# Altium PCB PCB_NACE V2_2021-09-25.pcbdoc
Units mm, origin at the board's own origin, x right, y up, seen from the top; angles counter-clockwise.
Board outline 140.46 x 137.67 mm, 2 copper layers (Top Layer, Bottom Layer); 113 components, 68 nets, 361 pads, 187 vias.
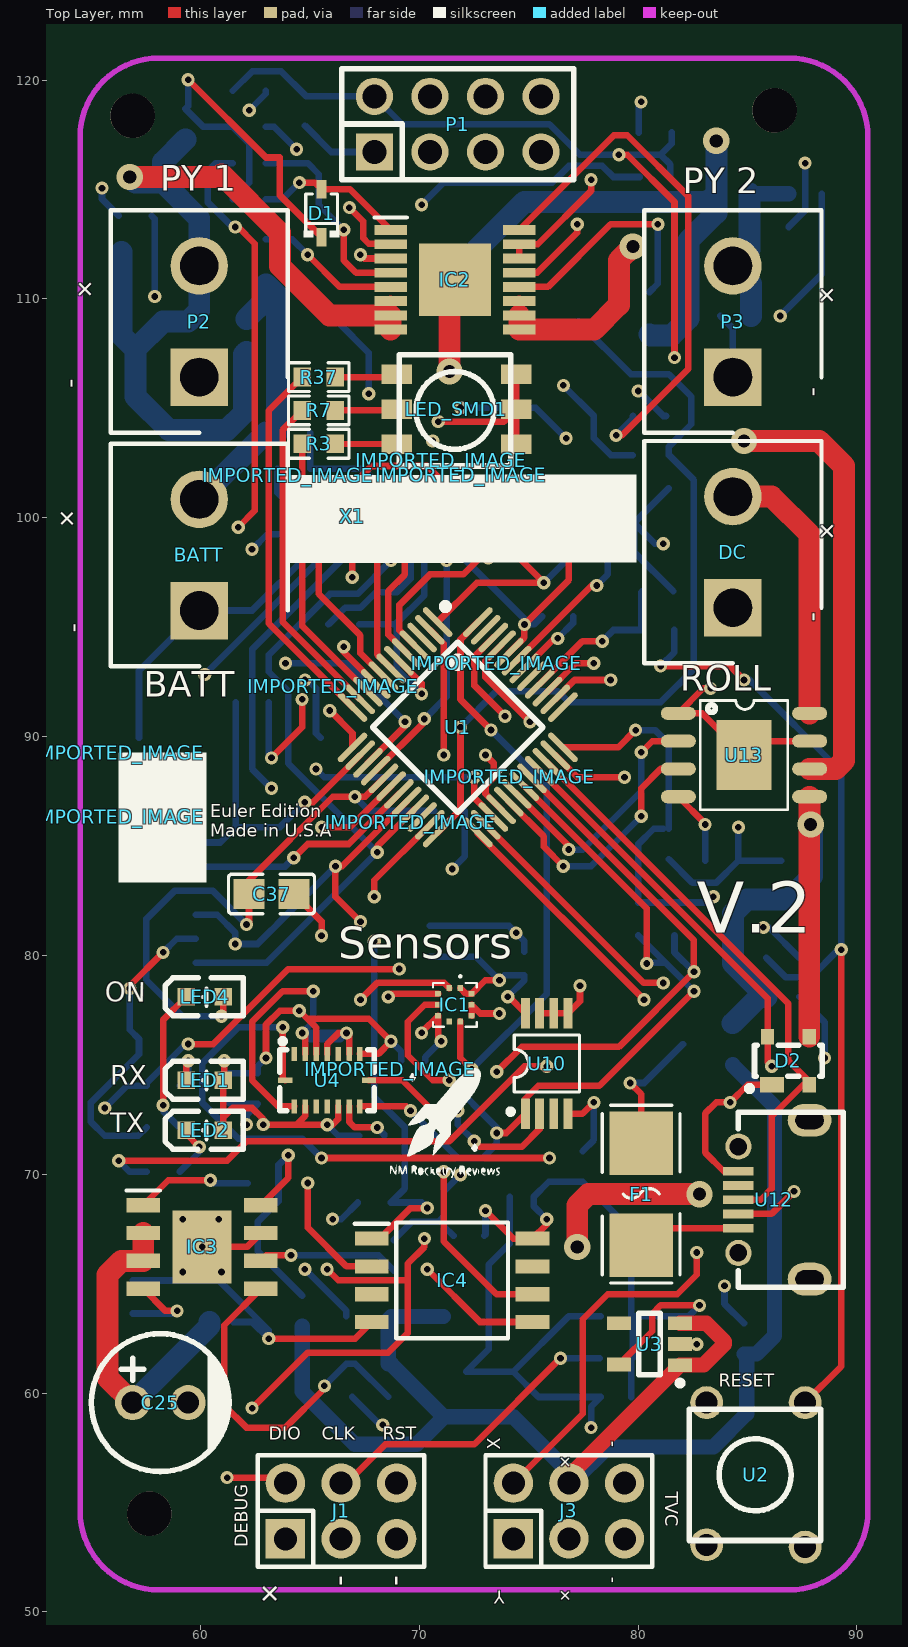
[diagram p0: Top Layer view]
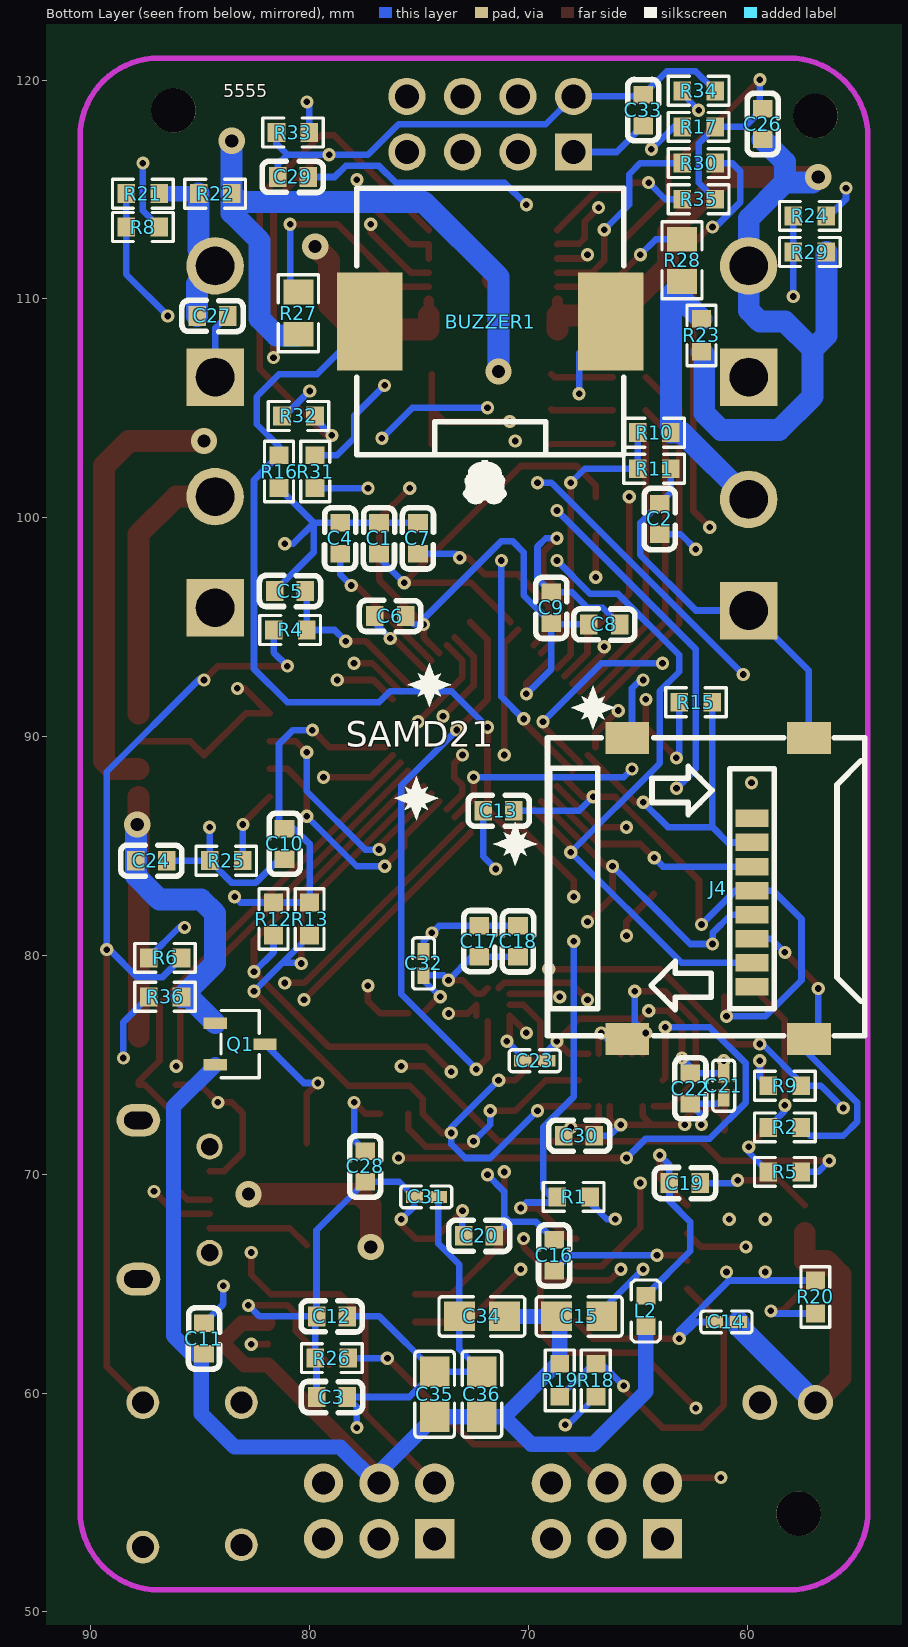
[diagram p1: Bottom Layer view, seen from below]

## Layer stack, top to bottom
Top Layer: signal copper (thickness not stored)
Dielectric: dielectric 0.32, FR-4, Dk 4.8
Bottom Layer: signal copper (thickness not stored)

## Board outline
165.862,25.4 25.4,25.4 25.4,163.068 165.862,163.068

## Components (designator, comment, footprint, x,y, rotation, side; value= is the part's Value field where it differs from the comment)
BATT "1985865" SHDR2W110P0X508_1X2_1016X810X1 59.944,95.758 r90 top
BUZZER1 "PKLCS1212E4001-R1" BUZ-SMD_2P-L12.0-W12.0-L 71.755,108.966 r0 bottom
C1 "22pF" C0603 76.835,99.06 r270 bottom
C2 "22pF" C0603 64.008,99.949 r270 bottom
C3 "100nF" C0603 78.994,59.817 r180 bottom
C4 "1uF" C0603 78.613,99.06 r270 bottom
C5 "100nF" C0603 80.899,96.647 r0 bottom
C6 "100nF" C0603 76.327,95.504 r0 bottom
C7 "100nF" C0603 75.057,99.06 r270 bottom
C8 "1uF" C0603 66.548,95.123 r180 bottom
C9 "100nF" C0603 68.961,95.885 r270 bottom
C10 "100nF" C0603 81.153,85.09 r90 bottom
C11 "1uF" C0603 84.836,62.484 r90 bottom
C12 "1uF" C0603 78.994,63.5 r0 bottom
C13 "100nF" C0603 71.374,86.614 r180 bottom
C14 "10uF" C0402 60.96,63.246 r0 bottom
C15 "22uF" C0805#1 67.691,63.5 r180 bottom
C16 "10nF" C0603 68.834,66.294 r270 bottom
C17 "100nF" C0603 72.263,80.645 r90 bottom
C18 "100nF" C0603 70.485,80.645 r270 bottom
C19 "100nF" C0603 62.865,69.596 r180 bottom
C20 "100nF" C0603 72.263,67.183 r180 bottom
C21 "10uF" C0402 61.087,74.041 r270 bottom
C22 "100nF" C0603 62.611,73.914 r90 bottom
C23 "10uF" C0402 69.723,75.184 r0 bottom
C24 "100nF" C0603 87.249,84.328 r180 bottom
C25 "22uF" CAP-TH_BD6.3-P2.50-D1.0-FD 58.166,59.563 r0 top
C26 "220nF" C0603 59.309,117.983 r90 bottom
C27 "220nF" C0603 84.455,109.22 r180 bottom
C28 "100nF" C0603 77.47,70.358 r270 bottom
C29 "100nF" C0603 80.772,115.57 r0 bottom
C30 "100nF" C0603 67.691,71.755 r180 bottom
C31 "10uF" C0402 74.676,68.961 r0 bottom
C32 "10uF" C0402 74.803,79.629 r90 bottom
C33 "100nF" C0603 64.77,118.618 r90 bottom
C34 "22uF" C0805#1 72.136,63.5 r0 bottom
C35 "22uF" C0805#1 74.295,59.944 r90 bottom
C36 "22uF" C0805#1 72.136,59.944 r90 bottom
C37 "22uF" C0805#2 63.246,82.804 r180 top
D1 "BAS21" SOD-323_L1.8-W1.3-LS2.5-RD 65.532,113.919 r90 top
D2 "SP0503BAHTG" SOT-143_L2.9-W1.3-P1.92-LS2.3-BR 86.868,75.184 r270 top
DC "DC Motor" SHDR2W110P0X508_1X2_1016X810X1 84.328,95.885 r90 top
F1 "0451.500MRL" FUSE-SMD_L6.1-W2.7 80.137,69.088 r90 top
IC1 "BMP388" BMP388 71.374,77.978 r0 top
IC2 "TPS2HB35AQPWPRQ1" SOP65P640X120-17N 71.628,110.871 r0 top
IC3 "AP64352SP-13" SOIC127P600X163-9N 60.071,66.675 r0 top
IC4 "S25FL128LAGMFI010" SOIC127P800X216-8N 71.501,65.151 r0 top
IMPORTED_IMAGE "IMPORTED_IMAGE" IMPORTED_IMAGE 56.261,89.257 r0 top
IMPORTED_IMAGE "IMPORTED_IMAGE" IMPORTED_IMAGE 56.261,86.336 r0 top
IMPORTED_IMAGE "IMPORTED_IMAGE" IMPORTED_IMAGE 71.922,101.961 r0 top
IMPORTED_IMAGE "IMPORTED_IMAGE" IMPORTED_IMAGE 66.061,92.306 r0 top
IMPORTED_IMAGE "IMPORTED_IMAGE" IMPORTED_IMAGE 73.542,93.356 r0 top
IMPORTED_IMAGE "IMPORTED_IMAGE" IMPORTED_IMAGE 74.136,88.172 r0 top
IMPORTED_IMAGE "IMPORTED_IMAGE" IMPORTED_IMAGE 69.617,86.083 r0 top
IMPORTED_IMAGE "IMPORTED_IMAGE" IMPORTED_IMAGE 64.008,101.949 r0 top
IMPORTED_IMAGE "IMPORTED_IMAGE" IMPORTED_IMAGE 68.667,74.803 r0 top
IMPORTED_IMAGE "IMPORTED_IMAGE" IMPORTED_IMAGE 71.006,102.623 r0 top
J1 "Header-Male-2.54_2x3" HDR-TH_6P-P2.54-V-R2-C3-S2.54 66.421,54.61 r0 top
J3 "2x3" HDR-TH_6P-P2.54-V-R2-C3-S2.54 76.835,54.61 r0 top
J4 "47219-2001" TF-SMD_472192001 61.341,83.058 r270 bottom
L2 "5.6uH" L0603 64.643,63.754 r270 bottom
LED1 "RXLED" LED0603-R-RD 60.198,74.295 r0 top
LED2 "TXLED" LED0603-R-RD 60.198,72.009 r0 top
LED4 "POWERLED" LED0603-R-RD 60.198,78.105 r0 top
LED_SMD1 "SMD LED" "SMD 5050 RGB" 69.088,107.442 r0 top
P1 "NRF24L01" HDR-TH_8P-P2.54-V-M-R2-C4-S2.54 71.755,117.983 r0 top
P2 "1985865" SHDR2W110P0X508_1X2_1016X810X1 59.944,106.426 r90 top
P3 "1985865" SHDR2W110P0X508_1X2_1016X810X1 84.328,106.426 r90 top
Q1 "DMP3098L" SOT-23-3_L2.9-W1.6-P1.90-LS2.8-BR 83.185,75.946 r180 bottom
R1 "1K" R0603#1 67.945,68.961 r0 bottom
R2 "1K" R0603#1 58.293,72.136 r0 bottom
R3 "100Ω" R0603#2 65.405,103.378 r0 top
R4 "330" R0603#1 80.899,94.869 r180 bottom
R5 "1K" R0603#1 58.293,70.104 r0 bottom
R6 "10kΩ" R0603#1 86.614,79.883 r0 bottom
R7 "100Ω" R0603#2 65.405,104.902 r0 top
R8 "150K" R0603#1 87.63,113.284 r0 bottom
R9 "1K" R0603#1 58.293,74.041 r0 bottom
R10 "10kΩ" R0603#1 64.262,103.886 r0 bottom
R11 "4.7K" R0603#1 64.262,102.235 r0 bottom
R12 "4.7K" R0603#1 81.661,81.661 r90 bottom
R13 "4.7K" R0603#1 80.01,81.661 r270 bottom
R15 "1K" R0603#1 62.357,91.567 r0 bottom
R16 "1K" R0603#1 81.407,102.108 r270 bottom
R17 "1K" R0603#1 62.23,117.856 r0 bottom
R18 "22.1K" R0603#1 66.929,60.579 r270 bottom
R19 "115K" R0603#1 68.58,60.579 r270 bottom
R20 "200K" R0603#1 56.896,64.389 r90 bottom
R21 "240K" R0603#1 87.63,114.808 r180 bottom
R22 "100K" R0603#1 84.328,114.808 r0 bottom
R23 "100K" R0603#1 62.103,108.331 r270 bottom
R24 "150K" R0603#1 57.15,113.792 r0 bottom
R25 "18K" R0603#1 83.82,84.328 r0 bottom
R26 "1K" R0603#1 78.994,61.595 r0 bottom
R27 "25K" R0805 80.518,109.347 r90 bottom
R28 "25K" R0805 62.992,111.76 r270 bottom
R29 "240K" R0603#1 57.15,112.141 r180 bottom
R30 "15K" R0603#1 62.23,116.205 r180 bottom
R31 "15K" R0603#1 79.756,102.108 r90 bottom
R32 "15K" R0603#1 80.518,104.648 r180 bottom
R33 "15K" R0603#1 80.772,117.602 r180 bottom
R34 "15K" R0603#1 62.23,119.507 r0 bottom
R35 "4.7K" R0603#1 62.23,114.554 r0 bottom
R36 "10kΩ" R0603#1 86.614,78.105 r0 bottom
R37 "100Ω" R0603#2 65.405,106.426 r0 top
U1 "ATSAMD21G18A-AU" TQFP-48_L7.0-W7.0-P0.50-LS9.0-BL 71.755,90.424 r225 top
U2 "RESET" "PUSH BUTTON 6MM TA" 85.344,56.261 r270 top
U3 "AP2112K-3.3TRG1" SOT-25-5_L3.0-W1.8-P0.95-LS3.0-BR 80.518,62.23 r0 top
U4 "BMI088" LGA-16_L4.5-W3.0-P0.50-BL 65.786,74.295 r270 top
U10 "MCP9808T-E/MS" MSOP-8_L3.0-W3.0-P0.65-LS4.9-BL 75.819,75.057 r0 top
U12 "MicroUSB" MICROUSB 84.582,68.834 r270 top
U13 "DRV8871DDAR" SO-8_L4.9-W3.9-P1.27-LS6.0-BL-EP 84.836,89.154 r270 top
X1 "32.768KHz" FC-12M_L2.0-W1.2 66.929,100.076 r90 top

## Footprints (in the part's own frame and the unit in brackets; to place one, negate y for a bottom-side part, rotate by r counter-clockwise, add the part's x,y. Pads: shape width x height; smd on the part's side, far side on the other; paste and mask are expansions set on the pad)
BMP388 [mm]
  rect 0.25x0.275 smd: 1(0.5,0.526) 2(0,0.526) 6(0,-1) 7(0.5,-1)
  rect 0.275x0.25 smd: 3(-0.512,0.263) 4(-0.512,-0.237) 5(-0.512,-0.737) 8(1.012,-0.737) 9(1.012,-0.237) 10(1.012,0.263)
  silkscreen extent -0.75,-1.24 1.25,1.11
BUZ-SMD_2P-L12.0-W12.0-L [mm]
  rect 3x4.5 smd: 1(5.5,0) 2(-5.5,0)
  silkscreen extent -6.1,-6.1 6.1,6.1
C0402 [mm]
  rect 0.79x0.54 smd: 1(0.545,0) 2(-0.545,0)
  silkscreen extent -1.17,-0.5 1.17,0.5
C0603 [mm]
  rect 0.8x0.9 smd: 1(0.7,0) 2(-0.7,0)
  silkscreen extent -1.39,-0.72 1.41,0.71
C0805#1 [mm]
  rect 1.41x1.35 smd: 1(1.03,0) 2(-1.03,0)
  silkscreen extent -1.96,-0.9 1.96,0.9
C0805#2 [mm]
  rect 1.41x1.35 smd: 1(-1.03,0) 2(1.03,0)
  silkscreen extent -1.96,-0.9 1.96,0.9
CAP-TH_BD6.3-P2.50-D1.0-FD [mm]
  round 1.6 hole 1: 1(-1.27,0) 2(1.27,0)
  silkscreen extent -3.15,-3.15 3.17,3.15
FC-12M_L2.0-W1.2 [mm]
  rect 0.925x1.3 smd: 1(-0.863,0) 2(0.863,0)
  silkscreen extent -1.55,-0.88 1.55,0.88
FUSE-SMD_L6.1-W2.7 [mm]
  rect 2.91x2.905 smd: 1(-2.33,0) 2(2.33,0)
  silkscreen extent -4.06,-1.78 4.06,1.78
HDR-TH_6P-P2.54-V-R2-C3-S2.54 [mm]
  rect 1.8x1.8 hole 1.05: 1(-2.54,-1.27)
  round 1.8 hole 1.05: 2(-2.54,1.27) 3(0,-1.27) 4(0,1.27) 5(2.54,-1.27) 6(2.54,1.27)
  silkscreen extent -3.81,-2.54 3.81,2.54
HDR-TH_8P-P2.54-V-M-R2-C4-S2.54 [mm]
  rect 1.7x1.7 hole 1.1: 1(-3.81,-1.27)
  round 1.7 hole 1.1: 2(-3.81,1.27) 3(-1.27,-1.27) 4(-1.27,1.27) 5(1.27,-1.27) 6(1.27,1.27) 7(3.81,-1.27) 8(3.81,1.27)
  silkscreen extent -5.31,-2.54 5.31,2.54
IMPORTED_IMAGE [mm]
  silkscreen extent 0,-3 4,0
L0603 [mm]
  rect 0.8x0.864 smd: 1(-0.7,0) 2(0.7,0)
  silkscreen extent -1.41,-0.67 1.42,0.65
LED0603-R-RD [mm]
  rect 0.8x0.8 smd: 1(0.851,0) 2(-0.851,0)
  silkscreen extent -1.82,-0.86 1.77,0.86
LGA-16_L4.5-W3.0-P0.50-BL [mm]
  rect 0.65x0.25 smd: 1(-1.2,-1.498) 2(-1.2,-0.998) 3(-1.2,-0.498) 4(-1.2,0.002) 5(-1.2,0.502) 6(-1.2,1.002) 7(-1.2,1.502) 9(1.2,1.502) 10(1.2,1.002) 11(1.2,0.502) 12(1.2,0.002) 13(1.2,-0.498) 14(1.2,-0.998) 15(1.2,-1.498)
  rect 0.25x0.65 smd: 8(0,1.915) 16(0,-1.915)
  silkscreen extent -1.89,-2.16 1.4,2.16
MICROUSB [mm]
  rect 0.4x1.4 smd: 1(1.3,0) 2(0.65,0) 3(0,0) 4(-0.65,0) 5(-1.301,-0.001)
  round 1.2 hole 0.8: 6(-2.431,0) 7(2.431,0)
  oval 1.5x2 hole 0.8 slot 1.3 at 90 deg: 8(-3.63,3.251) 9(3.63,3.251)
  silkscreen extent -4,0 4,4.8
MSOP-8_L3.0-W3.0-P0.65-LS4.9-BL [mil]
  rect 15.98x55 smd: 1(-38.39,-90.55) 2(-12.8,-90.55) 3(12.8,-90.55) 4(38.39,-90.55) 5(38.39,90.55) 6(12.8,90.56) 7(-12.8,90.55) 8(-38.39,90.55)
  silkscreen extent -70,-91 59,51
"PUSH BUTTON 6MM TA" [mm]
  round 1.5 hole 1: 1(-3.302,2.286) 2(-3.302,-2.215) 3(3.302,2.286) 4(3.198,-2.215)
  silkscreen extent -3,-3 3,3
R0603#1 [mm]
  rect 0.806x0.864 smd: 1(0.753,0) 2(-0.753,0)
  silkscreen extent -1.39,-0.66 1.39,0.66
R0603#2 [mm]
  rect 0.806x0.864 smd: 1(-0.753,0) 2(0.753,0)
  silkscreen extent -1.39,-0.66 1.39,0.66
R0805 [mm]
  rect 1.133x1.377 smd: 1(0.966,0) 2(-0.966,0)
  silkscreen extent -1.76,-0.92 1.76,0.92
SHDR2W110P0X508_1X2_1016X810X1 [mm]
  rect 2.625x2.625 hole 1.75 slot 1.755 at 0 deg: 1(0,0)
  round 2.625 hole 1.75 slot 1.755 at 0 deg: 2(5.08,0)
  silkscreen extent -2.54,-4.05 7.62,4.05
"SMD 5050 RGB" [mm]
  rect 1.4x0.9 smd: 1(-0.127,-0.889) 2(5.334,-0.889) 3(-0.127,-2.489) 4(5.334,-2.489) 5(-0.127,-4.089) 6(5.334,-4.089)
  silkscreen extent 0,-5.08 5.08,0
SO-8_L4.9-W3.9-P1.27-LS6.0-BL-EP [mm]
  oval 0.6x1.6 smd: 1(-1.905,-3) 2(-0.635,-3) 3(0.635,-3) 4(1.905,-3) 5(1.905,3) 6(0.635,3) 7(-0.635,3) 8(-1.905,3)
  rect 3.2x2.5 smd: 9(0,0)
  silkscreen extent -2.5,-2 2.5,2
SOD-323_L1.8-W1.3-LS2.5-RD [mm]
  rect 0.845x0.455 smd: 1(-1.098,0) 2(1.098,0)
  silkscreen extent -1.1,-0.8 0.88,0.8
SOIC127P600X163-9N [mm]
  rect 1.525x0.65 smd: 1(-2.688,1.905) 2(-2.688,0.635) 3(-2.688,-0.635) 4(-2.688,-1.905) 5(2.688,-1.905) 6(2.688,-0.635) 7(2.688,0.635) 8(2.688,1.905)
  rect 2.71x3.35 smd: 9(0,0)
  silkscreen extent -3.45,2.58 -1.93,2.58
SOIC127P800X216-8N [mm]
  rect 1.55x0.65 smd: 1(-3.675,1.905) 2(-3.675,0.635) 3(-3.675,-0.635) 4(-3.675,-1.905) 5(3.675,-1.905) 6(3.675,-0.635) 7(3.675,0.635) 8(3.675,1.905)
  silkscreen extent -4.45,-2.64 2.55,2.64
SOP65P640X120-17N [mm]
  rect 1.475x0.45 smd: 1(-2.938,2.275) 2(-2.938,1.625) 3(-2.938,0.975) 4(-2.938,0.325) 5(-2.938,-0.325) 6(-2.938,-0.975) 7(-2.938,-1.625) 8(-2.938,-2.275) 9(2.938,-2.275) 10(2.938,-1.625) 11(2.938,-0.975) 12(2.938,-0.325) 13(2.938,0.325) 14(2.938,0.975) 15(2.938,1.625) 16(2.938,2.275)
  rect 3.3x3.3 smd: 17(0,0)
  silkscreen extent -3.67,2.85 -2.2,2.85
SOT-23-3_L2.9-W1.6-P1.90-LS2.8-BR [mm]
  rect 1.07x0.532 smd: 1(-1.135,0.95) 2(-1.135,-0.95) 3(1.135,0)
  silkscreen extent -0.88,-1.54 0.88,1.54
SOT-25-5_L3.0-W1.8-P0.95-LS3.0-BR [mil]
  rect 43.5x24.5 smd: 1(55,-37.5) 2(55,0.5) 3(55,37.5) 4(-55,37.5) 5(-55,-36.5)
  silkscreen extent -20,-75 60,56
SOT-143_L2.9-W1.3-P1.92-LS2.3-BR [mm]
  rect 0.7x1.1 smd: 1(1.1,-0.75)
  rect 0.7x0.6 smd: 2(1.1,0.95) 3(-1.1,0.95) 4(-1.1,-0.95)
  silkscreen extent -0.7,-1.9 1.4,1.55
TF-SMD_472192001 [mm]
  rect 0.8x1.5 smd: 1(-3.2,1.55) 2(-2.1,1.55) 3(-1,1.55) 4(0.1,1.55) 5(1.2,1.55) 6(2.3,1.55) 7(3.4,1.55) 8(4.5,1.55)
  rect 1.45x2 smd: 9(-6.88,-4.15) 10(6.88,-4.15) 11(6.88,4.15) 12(-6.88,4.15)
  silkscreen extent -6.89,-7.8 6.73,6.7
TQFP-48_L7.0-W7.0-P0.50-LS9.0-BL [mm]
  oval 0.28x1.8 smd: 1(-2.75,-4.05) 2(-2.25,-4.05) 3(-1.75,-4.05) 4(-1.25,-4.05) 5(-0.75,-4.05) 6(-0.25,-4.05) 7(0.25,-4.05) 8(0.75,-4.05) 9(1.25,-4.05) 10(1.75,-4.05) 11(2.25,-4.05) 12(2.75,-4.05) 25(2.75,4.05) 26(2.25,4.05) 27(1.75,4.05) 28(1.25,4.05) 29(0.75,4.05) 30(0.25,4.05) 31(-0.25,4.05) 32(-0.75,4.05) 33(-1.25,4.05) 34(-1.75,4.05) 35(-2.25,4.05) 36(-2.75,4.05)
  oval 1.8x0.28 smd: 13(4.05,-2.75) 14(4.05,-2.25) 15(4.05,-1.75) 16(4.05,-1.25) 17(4.05,-0.75) 18(4.05,-0.25) 19(4.05,0.25) 20(4.05,0.75) 21(4.05,1.25) 22(4.05,1.75) 23(4.05,2.25) 24(4.05,2.75) 37(-4.05,2.75) 38(-4.05,2.25) 39(-4.05,1.75) 40(-4.05,1.25) 41(-4.05,0.75) 42(-4.05,0.25) 43(-4.05,-0.25) 44(-4.05,-0.75) 45(-4.05,-1.25) 46(-4.05,-1.75) 47(-4.05,-2.25) 48(-4.05,-2.75)
  silkscreen extent -3.65,-4.45 2.75,2.75

## Free pads (board coordinates)
  round 2.032 hole 2.032 unplated: ""(56.896,118.364) ""(57.658,54.483) ""(86.233,118.618)

## Via types
v1: diameter 0.61, hole 0.305, Top Layer to Bottom Layer, 95 vias
v2: diameter 0.6, hole 0.3, Top Layer to Bottom Layer, 84 vias
v3: diameter 1.2, hole 0.6, Top Layer to Bottom Layer, 8 vias

## Nets (pads, with @x,y where several pads share a name; then routed paths per layer and width w, separated by ;. In a path a pad name is that pad's centre, name@x,y a point inside that pad or via, vN(x,y) a via of type N, cw(c..) or ccw(c..) an arc to the next point about the centre after c; other vN are vias at no path point)
+3V3: C3.2 C6.2 C8.2 C9.1 C10.1 C12.1 C13.1 C17.2 C18.1 C20.2 C21.2 C22.1 C23.2 C28.1 C29.1 C30.1 C31.1 C32.2 C33.1 C37.2 IC1.1 IC1.10 IC4.8 J1.1 J4.4 LED1.1 LED2.1 LED4.1 P1.2 R1.2 R6.1 R12.1 R13.2 R15.1 R26.1 R33.2 R34.2 U1.6 U1.17 U1.36 U1.44 U3.5 U4.3 U4.7 U4.11 U4.14 U10.8 | length 261.2
  Top Layer w0.3: v2(60.96,77.216) 61.049,77.305 LED4.1 ; v2(61.087,75.184) 61.087,74.333 LED1.1 LED2.1 61.049,72.606 61.468,73.025 62.357,73.025 62.865,72.517 v2(62.865,72.263) 64.389,72.263 ; v1(62.103,81.407) 62.216,81.52 C37.2 62.216,83.425 66.04,87.249 v2(67.056,87.249) 67.519,87.249 U1.17 ; v2(62.357,59.309) 64.897,61.849 68.58,61.849 69.469,62.738 69.469,65.913 70.231,66.675 v2(70.231,67.056) ; v1(62.992,75.311) 62.992,76.835 63.627,77.47 v1(64.516,77.47) 65.288,76.698 U4.3 ; v2(63.246,89.027) 64.643,90.424 v2(64.643,91.694) ; U4.14 64.788,72.662 64.389,72.263 ; 64.884,77.102 67.691,77.102 v2(68.707,76.073) 68.129,75.495 U4.7 ; v2(65.786,65.659) 66.294,65.151 69.469,65.151 ; U4.11 66.288,72.511 66.04,72.263 v1(65.786,72.263) 64.389,72.263 ; U1.6 70.104,92.429 v2(70.104,91.948) ; IC1.1 72.137,78.241 IC1.10 73.012,78.867 v1(73.66,78.867) ; v1(73.025,68.326) 74.295,67.056 IC4.8 75.819,67.699 v1(75.819,67.945) ; v1(74.041,78.105) 74.096,78.105 U10.8 ; U1.44 74.803,94.531 v1(74.803,95.123) 76.835,97.155 76.835,99.949 v1(75.438,101.346) ; U1.36 79.091,89.505 v2(79.883,90.297) ; U3.5 80.645,62.827 80.645,63.627 81.026,64.008 v2(82.804,64.008) ; v2(79.121,116.586) 79.502,116.586 81.661,114.427 v2(81.661,107.315)
  Mid-Layer 2 w0.3: v2(60.96,77.216) 60.96,75.311 v2(61.087,75.184) ; v2(62.357,59.309) 62.357,54.864 J1.1 ; v2(62.865,72.263) 62.865,68.58 v2(65.786,65.659) ; v2(63.246,89.027) 63.881,89.027 64.008,88.9 65.659,87.249 v2(67.056,87.249) ; 63.5,67.945 v2(66.04,67.945) ; v2(64.643,91.694) 64.643,91.193 65.793,90.043 66.294,90.043 68.199,91.948 v2(70.104,91.948) ; v2(68.707,76.073) 68.707,76.835 70.739,78.867 v1(73.66,78.867) ; v2(70.231,67.056) 71.501,68.326 v1(73.025,68.326) ; v1(74.803,95.123) 78.359,95.123 78.867,95.123 79.756,94.488 79.756,90.424 v2(79.883,90.297) ; v1(75.438,101.346) 79.121,105.029 79.121,105.791 80.645,107.315 v2(81.661,107.315) ; v2(83.439,82.677) 84.328,82.677 v2(85.725,81.28)
  Bottom Layer w0.3: J4.4 60.552,82.958 v1(62.103,81.407) ; J4.4 58.829,82.959 57.531,81.661 57.531,78.867 59.182,77.216 v2(60.96,77.216) ; C21.2 61.115,74.614 C22.1 62.611,74.93 v1(62.992,75.311) ; R34.2 62.366,120.396 63.692,120.396 C33.1 64.835,119.253 P1.2 69.215,117.983 75.946,117.983 77.343,116.586 v2(79.121,116.586) 81.026,116.586 ; R15.1 63.111,89.162 v2(63.246,89.027) ; v1(65.786,72.263) 66.294,71.755 C30.1@67.244,71.755 ; v2(66.04,67.945) 66.43,67.945 R1.2@67.192,68.707 ; v2(67.056,87.249) 67.691,86.614 C13.1 ; C8.2 68.899,95.123 C9.1 ; v2(68.707,76.073) 69.177,75.603 C23.2 ; v2(70.104,91.948) 68.961,93.091 C9.1 ; C18.1 C17.2 ; C17.2 72.583,79.944 v1(73.66,78.867) 73.877,79.084 C32.2 ; C20.2 73.025,67.245 v1(73.025,68.326) ; v1(74.041,78.105) 74.803,78.867 C32.2 ; C31.1 75.918,69.658 C28.1 79.694,67.434 C12.1 79.747,63.447 R26.1 79.694,61.542 C3.2 ; C31.1 75.222,68.542 v1(75.819,67.945) ; C6.2 75.246,95.123 v1(74.803,95.123) 74.803,95.377 71.247,98.933 70.739,98.933 70.231,98.425 70.231,96.455 C9.1 ; C12.1 82.296,63.5 v2(82.804,64.008) ; v2(79.883,90.297) 80.772,90.297 81.407,89.662 C10.1@81.407,85.79 ; C10.1 80.71,85.79 80.01,85.09 R13.2 R12.1 ; C29.1 81.473,116.139 81.026,116.586 ; R33.2 81.525,117.085 81.026,116.586 ; R12.1 83.177,82.415 v2(83.439,82.677) ; v2(85.725,81.28) 85.97,81.28 R6.1
+5V: C11.2 C15.2 C34.2 C35.2 C36.2 J3.3 J3.4 L2.2 Q1.2 R19.2 U3.1 U3.3 | length 68.5
  Top Layer w0.7: J3.4 76.835,56.197 U3.1 82.995,61.277 83.947,62.23 83.947,62.357 83.121,63.182 U3.3
  Mid-Layer 2 w0.7: J3.3 J3.4
  Bottom Layer w0.7: L2.2 64.643,60.071 67.056,57.658 69.878,57.658 71.135,58.915 ; C34.2 C15.2 68.58,63.359 R19.2 68.716,61.332 71.134,58.914 C36.2 C35.2 76.835,56.374 J3.4 76.962,55.88 78.613,57.531 83.439,57.531 84.963,59.055 84.963,61.656 C11.2 ; Q1.2 86.233,73.083 86.233,62.611 85.406,61.784 C11.2
BUZZER: BUZZER1.1 R16.2 U1.24 | length 37.4
  Top Layer w0.3: U1.24 71.882,86.662 v1(71.882,90.424)
  Bottom Layer w0.3: v1(71.882,90.424) 73.533,92.075 76.327,92.075 76.835,91.567 81.026,91.567 82.55,93.091 82.55,101.718 R16.2 81.407,103.251 82.423,104.267 82.423,105.537 81.407,106.553 79.668,106.553 BUZZER1.1
CE: P1.3 U1.16 | length 37.7
  Top Layer w0.3: U1.16@68.008,88.445 70.231,90.668 v1(70.231,90.805)
  Mid-Layer 2 w0.3: P1.3 70.485,115.951 73.406,113.03 73.406,106.807 73.406,106.553 v1(71.882,105.029) ; v2(71.247,98.044) 76.708,103.505 v2(76.708,103.632)
  Bottom Layer w0.3: v1(70.231,90.805) 71.247,91.821 v2(71.247,98.044) ; v1(71.882,105.029) 75.311,105.029 v2(76.708,103.632)
CS_FRAM: IC4.1 R1.1 U1.23 | length 24
  Top Layer w0.3: IC4.1 68.199,67.056 69.596,68.453 v1(70.358,68.453) ; v1(67.945,82.677) 67.945,83.431 U1.23
  Mid-Layer 2 w0.3: v1(67.945,80.645) v1(67.945,82.677)
  Bottom Layer w0.3: v1(67.945,80.645) 67.945,80.01 67.945,73.533 69.342,72.136 69.342,71.501 69.342,69.351 R1.1@68.698,68.707 ; R1.1@68.699,68.707 70.104,68.707 v1(70.358,68.453)
CS_SD: J4.2 R15.2 U1.14 | length 14.9
  Top Layer w0.3: v1(64.77,86.995) 65.143,86.995 U1.14
  Bottom Layer w0.3: J4.2 60.901,85.158 61.604,85.861 ; R15.2 61.604,85.861 ; v1(64.77,86.995) 63.636,85.861 61.604,85.861
CSN: P1.4 U1.15 | length 41.7
  Top Layer w0.3: U1.15 69.342,90.487 v1(69.342,90.678)
  Mid-Layer 2 w0.3: v1(63.881,93.345) 64.262,93.345 67.945,97.028 67.945,100.457 68.834,101.346 68.834,102.108 70.231,103.505 v1(70.612,103.505) 71.628,103.505 73.914,105.791 73.914,113.411 71.882,115.443 71.755,115.443 71.755,117.983 P1.4
  Bottom Layer w0.3: v1(63.881,93.345) 66.675,93.345 v1(69.342,90.678)
D+: D2.2 U1.34 U12.3 | length 27
  Top Layer w0.3: U1.34 86.868,77.786 86.868,75.184 87.818,74.234 D2.2 87.546,74.084 86.106,72.644 86.106,69.342 85.598,68.834 U12.3
D-: D2.4 U1.33 U12.2 | length 27
  Top Layer w0.3: U1.33@75.503,88.444 85.918,78.029 D2.4 85.918,75.118 v2(86.106,74.93) ; U12.2 86.091,68.184 v2(87.122,69.215)
  Mid-Layer 2 w0.3: v2(86.106,74.93) 86.106,70.231 v2(87.122,69.215)
DC_OUT1: DC.1 U13.6 | length 30.5
  Top Layer w1: v3(84.836,103.505) 88.265,103.505 89.408,102.362 89.408,88.9 89.027,88.519 U13.6
  Mid-Layer 2 w1: DC.1 84.328,96.393 82.296,98.552 82.296,98.679 82.296,102.362 83.439,103.505 v3(84.836,103.505)
DC_OUT2: DC.2 U13.8 | length 12.4
  Top Layer w1: DC.2 86.106,100.965 87.836,99.235 U13.8
DIAN_EN: R32.2 U1.28 | length 27.9
  Top Layer w0.3: v1(73.025,89.154) 73.406,88.773 73.406,88.138 73.025,87.757 73.025,87.386 U1.28@73.735,86.676
  Mid-Layer 2 w0.3: v1(73.025,89.154) 72.136,89.154 70.866,90.424 70.866,93.599 81.534,104.267 v1(80.01,105.791)
  Bottom Layer w0.3: v1(80.01,105.791) 81.153,104.648 R32.2
EN1: R30.1 U1.27 | length 41
  Top Layer w0.3: v1(61.595,113.284) 61.722,113.284 62.484,112.522 62.484,100.33 v1(61.722,99.568) ; v1(72.517,88.138) 72.517,87.187 U1.27
  Mid-Layer 2 w0.3: v1(61.722,99.568) 61.722,92.075 v1(65.278,88.519)
  Bottom Layer w0.3: R30.1 60.706,116.205 60.325,115.824 60.325,114.427 61.468,113.284 v1(61.595,113.284) ; v1(65.278,88.519) 65.659,88.138 v1(72.517,88.138)
EN2: R31.2 U1.13 | length 20.2
  Top Layer w0.3: v1(65.913,91.186) 66.946,90.153 U1.13
  Mid-Layer 2 w0.3: v1(65.913,91.186) 72.263,97.536 73.533,97.536 v1(77.343,101.346)
  Bottom Layer w0.3: v1(77.343,101.346) R31.2
F1_1: F1.1 U12.1 | length 4.8
  Top Layer w0.3: F1.1 80.913,67.534 U12.1
F1_2: F1.2 Q1.3 | length 6.1
  Top Layer w0.3: v2(79.629,74.168) 80.137,73.66 F1.2
  Bottom Layer w0.3: v2(79.629,74.168) 80.272,74.168 Q1.3
FIRE_1: C26.2 IC2.6 IC2.7 IC2.8 P2.2 R23.1 R29.1 | length 46.7
  Top Layer w0.5: IC2.7 IC2.6
  Top Layer w1: v3(56.769,115.57) 60.833,115.57 60.96,115.697 63.627,113.03 63.627,111.506 65.887,109.246 IC2.7 IC2.8
  Bottom Layer w1: R29.1 56.397,108.322 57.023,107.696 ; v3(56.769,115.57) 57.023,115.316 58.293,115.316 ; C26.2 58.293,116.267 58.293,115.316 ; R23.1 61.976,107.451 61.976,104.775 61.214,104.013 58.547,104.013 57.023,105.537 57.023,107.696 ; 57.023,107.696 58.293,108.966 59.436,108.966 59.944,109.474 P2.2 59.944,113.665 58.293,115.316
FIRE_2: C27.2 IC2.9 IC2.10 IC2.11 P3.2 R21.1 R22.1 | length 22.2
  Top Layer w0.5: IC2.10 IC2.11
  Top Layer w1: IC2.10 IC2.9 77.989,108.596 79.121,109.728 79.121,111.76 v3(79.756,112.395)
  Mid-Layer 2 w1: v3(79.756,112.395) 83.439,112.395 P3.2
  Bottom Layer w0.7: R22.1 R21.1
  Bottom Layer w1: R22.1 85.081,112.259 P3.2 85.155,110.679 C27.2
GND: BATT.1 BUZZER1.2 C1.2 C2.2 C3.1 C4.2 C5.1 C6.1 C7.2 C8.1 C9.2 C10.2 C11.1 C12.2 C13.2 C14.1 C15.1 C16.2 C17.1 C18.2 C20.1 C21.1 C22.2 C23.1 C24.1 C25.2 C26.1 C27.1 C28.2 C29.2 C30.2 C31.2 C32.1 C33.2 C34.1 C35.1 C36.1 C37.1 D1.1 D2.1 IC1.3 IC1.5 IC1.8 IC1.9 IC3.7 IC3.9 IC4.4 J1.3 J1.5 J3.5 J3.6 J4.6 J4.9 J4.10 J4.11 J4.12 LED_SMD1.2 LED_SMD1.4 LED_SMD1.6 P1.1 P2.1 P3.1 R2.2 R8.2 R11.2 R16.1 R17.2 R18.1 R20.1 R24.2 R25.1 R35.2 R36.1 U1.5 U1.18 U1.35 U1.42 U2.3 U2.4 U3.2 U4.2 U4.4 U4.6 U4.10 U4.15 U10.4 U10.5 U10.6 U10.7 U12.5 U13.1 U13.7 U13.9 | length 273.6
  Top Layer w0.3: v2(56.769,78.486) 56.769,78.613 v2(58.293,80.137) ; v2(59.436,120.015) 62.992,116.459 63.627,116.459 63.627,114.726 D1.1 ; v2(60.071,66.675) 62.124,66.675 IC3.7 ; v2(63.119,62.484) 67.064,62.484 IC4.4 ; C37.1 65.532,81.548 v1(65.532,80.899) ; U4.15 63.557,73.095 62.357,74.295 62.357,76.962 63.754,78.359 v2(65.151,78.359) ; v1(64.643,76.454) 64.788,76.309 U4.2 ; v2(65.532,85.852) 66.829,85.852 U1.18 ; U4.4 65.786,75.938 66.302,76.454 v1(66.675,76.454) 66.788,76.341 U4.6 ; U4.10 66.788,72.404 66.929,72.263 67.056,72.136 67.564,72.136 v1(68.072,72.136) ; v2(68.58,78.105) 68.716,78.241 IC1.3 ; v2(68.707,99.06) 69.342,98.425 69.342,97.409 68.58,96.647 68.58,94.661 U1.5 ; v2(70.104,76.454) 70.104,76.483 IC1.5 70.862,76.204 v2(70.993,76.073) ; v2(70.866,104.394) 73.863,104.394 LED_SMD1.4 ; IC1.8 IC1.9 72.784,77.343 v2(73.66,77.343) ; LED_SMD1.6 LED_SMD1.4 ; LED_SMD1.2 LED_SMD1.4 ; U1.42 76.173,94.488 v2(76.327,94.488) ; U10.7@75.494,77.357 U10.6 U10.5 77.343,77.906 v2(77.343,78.613) ; U1.35 77.223,88.138 v2(79.375,88.138) ; U10.4 77.455,72.758 v2(77.978,73.279) ; U3.2 81.928,62.23 v2(82.677,62.23) ; v2(83.312,92.202) 82.979,92.202 U13.1 82.931,91.059 U13.9 85.471,89.789 U13.7 ; U12.5 83.916,70.135 83.058,70.993 83.058,72.771 83.566,73.279 v2(84.201,73.279) 85.006,74.084 D2.1
  Mid-Layer 1 w0.3: v2(84.201,73.279) 84.328,73.406 84.328,74.168
  Mid-Layer 2 w0.3: v1(59.182,65.532) v1(60.96,65.532) ; v1(59.182,67.945) v1(60.833,67.945) ; v2(84.201,73.279) 84.709,73.279 85.598,72.39 85.598,68.58 86.741,67.437 87.884,67.437 88.138,67.691 88.138,69.723 89.535,71.12 89.535,74.295 v2(88.519,75.311)
  Bottom Layer w0.3: v2(55.499,115.062) 55.499,114.563 R24.2@56.27,113.792 ; v2(56.769,78.486) 56.769,76.6 J4.11 57.191,75.479 54.991,73.279 54.991,72.39 55.626,71.755 57.159,71.755 R2.2 ; R20.1 60.842,65.142 63.119,62.865 v2(63.119,62.484) 62.357,63.246 C14.1 ; J4.12 57.191,93.005 BATT.1 62.357,95.758 64.897,98.298 64.897,99.76 C2.2 63.509,101.148 R11.2 ; v2(58.293,80.137) 58.914,80.758 J4.6 ; v2(59.436,120.015) 59.436,118.81 C26.1 60.136,117.856 R17.2 62.23,117.103 62.23,115.307 R35.2 ; C21.1 61.369,73.214 C22.2 62.103,72.706 v2(62.103,72.263) ; v2(64.77,65.659) 66.661,63.768 C15.1 ; v2(64.77,92.583) 64.897,92.583 65.278,92.202 65.278,91.44 65.278,90.151 J4.9 ; C33.2 65.975,116.713 P1.1 ; v2(65.151,78.359) 65.151,76.962 v1(64.643,76.454) ; J4.10 66.398,76.177 v1(66.675,76.454) v1(64.643,76.454) ; J4.10 64.919,76.178 v1(64.643,76.454) ; C8.1 66.61,95.885 67.31,95.885 68.01,96.585 C9.2 69.596,97.22 69.596,98.679 69.215,99.06 v2(68.707,99.06) ; BUZZER1.2 67.691,107.531 v2(67.691,105.664) ; R18.1 68.208,58.547 v2(68.326,58.547) ; v1(68.072,72.136) 68.392,71.816 C30.2 ; C16.2 69.658,67.818 70.866,67.818 71.12,68.072 71.12,68.961 71.12,69.215 v2(71.882,69.977) ; v2(70.104,114.3) 71.12,115.316 76.073,115.316 76.835,116.078 78.359,116.078 78.867,115.57 C29.2 ; C23.1 70.269,75.349 v2(70.993,76.073) ; C18.2 C17.1 74.103,81.345 v2(74.422,81.026) 74.803,80.645 C32.1 ; 71.12,68.253 71.12,67.626 C20.1 ; v1(71.501,83.947) 72.074,84.52 C13.2 ; C31.2 74.131,66.827 73.217,65.913 73.166,65.862 C34.1 73.166,62.004 C36.1 C35.1 ; C7.2 C1.2 C4.2 79.812,99.76 ; v2(76.327,94.488) 77.027,95.188 C6.1 ; C28.2 77.978,71.566 v2(77.978,73.279) ; v2(77.851,58.42) 77.851,59.374 C3.1 75.452,59.817 C35.1 ; C12.2 76.821,63.5 C35.1 ; v1(81.153,98.806) 80.766,98.806 79.812,99.76 ; C10.2@81.407,84.39 82.485,83.312 83.557,83.312 R25.1 ; R16.1 79.812,99.76 ; C5.1 79.812,98.434 79.812,99.76 ; C27.1 84.328,108.647 P3.1 ; v2(83.947,64.897) 83.947,64.073 C11.1 ; v2(84.582,85.852) 84.582,84.337 R25.1 ; C24.1 R25.1 ; R8.2 87.63,114.037 87.63,114.427 v2(87.63,116.205) ; R36.1 88.519,76.953 v2(88.519,75.311)
IC2_1: D1.2 IC2.1 R35.1 | length 6.9
  Top Layer w0.3: v2(64.516,115.316) 65.233,115.316 D1.2 66.82,115.017 IC2.1
  Bottom Layer w0.3: R35.1 63.754,114.554 v2(64.516,115.316)
IC2_2: IC2.2 R17.1 | length 8.5
  Top Layer w0.3: v2(66.802,114.173) 67.437,113.538 67.437,112.776 67.691,112.522 68.664,112.522 IC2.2
  Mid-Layer 2 w0.3: v2(64.389,116.84) 64.389,116.586 v2(66.802,114.173)
  Bottom Layer w0.3: R17.1 63.373,117.856 v2(64.389,116.84)
IC2_4: IC2.4 R30.2 | length 9.4
  Top Layer w0.3: v2(66.548,113.157) 66.548,111.76 67.112,111.196 IC2.4
  Bottom Layer w0.3: R30.2 64.897,116.205 65.405,115.697 65.405,114.3 v2(66.548,113.157)
IC2_5: IC2.5 R28.2 | length 6.6
  Top Layer w0.3: v2(64.897,112.014) 66.365,110.546 IC2.5
  Bottom Layer w0.3: R28.2 64.186,112.725 v2(64.897,112.014)
IC2_12: IC2.12 R27.1 | length 10.8
  Top Layer w0.3: IC2.12 75.875,110.546 78.74,113.411 v2(80.899,113.411)
  Bottom Layer w0.3: R27.1 80.899,110.693 v2(80.899,113.411)
IC2_13: IC2.13 R31.1 | length 16.8
  Top Layer w0.3: IC2.13 75.382,111.196 77.216,113.03 v2(77.216,113.411)
  Mid-Layer 2 w0.3: v2(76.581,106.045) 77.216,106.68 77.216,112.24 76.835,112.621 76.835,113.03 v2(77.216,113.411)
  Bottom Layer w0.3: v2(76.581,106.045) 77.978,104.648 77.978,103.632 78.748,102.862 R31.1
IC2_15: IC2.14 IC2.15 R33.1 | length 12
  Top Layer w0.3: IC2.14 IC2.15 75.412,112.496 77.851,114.935 v2(77.851,115.443)
  Mid-Layer 2 w0.3: v2(77.851,115.443) 78.867,115.443 79.629,116.205 80.137,116.713 v2(80.137,118.999)
  Bottom Layer w0.3: R33.1 80.018,118.88 v2(80.137,118.999)
IC2_16: IC2.16 R32.1 | length 24.3
  Top Layer w0.3: IC2.16 78.895,117.475 79.502,117.475 82.296,114.681 82.296,106.807 79.248,103.759 v2(78.994,103.759)
  Bottom Layer w0.3: v2(78.994,103.759) 79.764,104.529 R32.1
IC3_1: C19.1 IC3.1 | length 5.3
  Top Layer w0.3: IC3.1 58.526,69.723 v2(60.452,69.723)
  Bottom Layer w0.3: v2(60.452,69.723) 60.579,69.596 C19.1
IC3_4: IC3.4 R20.2 | length 4
  Top Layer w0.3: IC3.4 58.399,63.754 v2(58.928,63.754)
  Bottom Layer w0.3: R20.2 58.809,63.635 v2(58.928,63.754)
IC3_5: IC3.5 R18.2 R19.1 | length 15.8
  Top Layer w0.3: IC3.5 61.087,63.098 61.087,59.436 62.103,58.42 63.881,58.42 65.659,60.198 v2(65.659,60.325)
  Bottom Layer w0.3: v2(65.659,60.325) 66.667,61.333 R18.2 ; R18.2 67.073,61.332 R19.1
IC3_6: C16.1 IC3.6 | length 6.5
  Top Layer w0.3: IC3.6 63.013,66.294 v2(64.135,66.294)
  Bottom Layer w0.3: v2(64.135,66.294) 68.133,66.294 C16.1
IC3_8: C19.2 IC3.8 L2.1 | length 10.6
  Top Layer w0.3: IC3.8 64.008,69.829 v2(64.008,70.866)
  Bottom Layer w0.3: C19.2 63.565,68.772 62.611,67.818 62.611,66.486 L2.1 ; C19.2 63.566,70.424 v2(64.008,70.866)
IN1: U1.29 U13.3 | length 11.8
  Top Layer w0.3: U1.29 75.692,85.426 75.692,84.963 v1(76.581,84.074) ; v1(80.137,86.36) 80.137,87.63 81.026,88.519 U13.3
  Bottom Layer w0.3: v1(76.581,84.074) 77.851,84.074 v1(80.137,86.36)
IN2: U1.30 U13.2 | length 11.6
  Top Layer w0.3: U1.30 76.835,84.99 v1(76.835,84.836) ; v1(80.137,89.281) 80.645,89.789 U13.2
  Bottom Layer w0.3: v1(76.835,84.836) 77.47,84.836 80.137,87.503 v1(80.137,89.281)
INT1: U1.38 U4.16 | length 51.7
  Top Layer w0.3: v1(63.754,76.708) 63.754,74.412 U4.16 ; v1(65.532,70.739) v1(75.946,70.739) ; U1.38 77.096,92.583 v1(78.74,92.583)
  Mid-Layer 2 w0.3: v1(75.946,70.739) 76.327,70.739 78.74,73.152 v1(78.74,92.583)
  Bottom Layer w0.3: v1(63.754,76.708) 61.722,76.708 60.071,75.057 60.071,73.279 61.722,71.628 64.643,71.628 v1(65.532,70.739)
INTB: IC1.7 U1.48 | length 26.2
  Top Layer w0.3: IC1.7 71.874,75.319 v1(72.39,74.803) ; U1.48 71.882,94.44 71.882,92.456 71.882,91.694 v1(73.279,90.297)
  Bottom Layer w0.3: v1(72.39,74.803) 75.819,78.232 75.819,87.757 v1(73.279,90.297)
LATCH: IC2.3 R34.1 | length 12
  Top Layer w0.3: v2(67.31,112.014) 67.478,111.846 IC2.3
  Mid-Layer 2 w0.3: v2(62.23,118.618) 62.23,115.951 64.262,113.919 66.167,112.014 v2(67.31,112.014)
  Bottom Layer w0.3: v2(62.23,118.618) 62.984,119.372 R34.1
LED1_2: LED1.2 R9.1 | length 2.2
  Top Layer w0.3: LED1.2 59.347,75.095 v1(59.436,75.184)
  Bottom Layer w0.3: R9.1 59.436,74.431 v1(59.436,75.184)
LED2_2: LED2.2 R5.1 | length 2.5
  Top Layer w0.3: LED2.2 59.347,71.844 v2(59.944,71.247)
  Bottom Layer w0.3: R5.1 59.944,71.002 v2(59.944,71.247)
LED4_2: LED4.2 R2.1 | length 6.7
  Top Layer w0.3: v2(58.293,73.152) 58.293,77.051 LED4.2
  Bottom Layer w0.3: v2(58.293,73.152) 58.293,72.889 R2.1
LED_B: R37.1 U1.12 | length 17.3
  Top Layer w0.3: R37.1 63.119,104.893 63.119,95.171 U1.12
LED_G: R3.1 U1.10 | length 12.6
  Top Layer w0.3: R3.1 64.652,95.052 U1.10
LED_R: R7.1 U1.11 | length 15
  Top Layer w0.3: R7.1 63.754,104.004 63.754,95.243 U1.11
LED_SMD1_1: LED_SMD1.1 R37.2 | length 2.9
  Top Layer w0.3: R37.2 68.834,106.426 LED_SMD1.1
LED_SMD1_3: LED_SMD1.3 R7.2 | length 2.8
  Top Layer w0.3: R7.2 68.91,104.902 LED_SMD1.3
LED_SMD1_5: LED_SMD1.5 R3.2 | length 2.8
  Top Layer w0.3: R3.2 LED_SMD1.5
MISO: IC4.2 J4.7 P1.7 U1.21 | length 78.1
  Top Layer w0.3: v1(64.897,69.596) 64.897,67.564 66.675,65.786 IC4.2 ; v1(68.072,84.709) 68.072,84.973 U1.21@69.776,86.677
  Mid-Layer 2 w0.3: v1(64.897,69.596) 64.897,71.247 61.722,74.422 61.722,78.867 64.262,81.407 64.77,81.407 v1(68.072,84.709) ; v1(68.707,98.044) 75.565,104.902 P1.7
  Bottom Layer w0.3: J4.7 63.021,79.658 v1(68.072,84.709) 64.008,88.773 64.008,92.075 63.119,92.964 63.119,93.726 65.913,96.52 67.183,96.52 v1(68.707,98.044)
MOSI: IC4.5 J4.3 P1.6 U1.19 | length 88.1
  Top Layer w0.3: v1(64.262,84.455) 64.897,85.09 66.774,85.09 U1.19 ; v1(70.358,65.659) 72.771,63.246 IC4.5
  Mid-Layer 2 w0.3: v1(63.246,87.63) 63.246,85.471 v1(64.262,84.455) 63.246,83.439 63.246,81.153 60.198,78.105 60.198,75.057 61.468,73.787 61.468,68.072 64.77,64.77 69.469,64.77 v1(70.358,65.659) ; v1(68.707,100.33) 68.834,100.457 70.104,100.457 73.406,103.759 75.057,105.41 75.057,114.046 74.295,114.808 74.295,115.443 74.295,117.983 P1.6
  Bottom Layer w0.3: J4.3 63.865,84.058 v1(64.262,84.455) ; v1(63.246,87.63) 62.357,88.519 62.357,89.408 62.357,93.98 v1(68.707,100.33)
P1_C: R24.1 R29.2 U1.8 | length 26.5
  Top Layer w0.3: v1(65.405,100.965) 65.405,96.52 67.31,94.615 67.31,93.807 U1.8
  Mid-Layer 2 w0.3: v1(57.912,110.109) 59.055,108.966 60.833,108.966 65.405,104.394 v1(65.405,100.965)
  Bottom Layer w0.3: R24.1@57.776,113.792 57.903,113.665 R29.2 ; R29.2 57.904,110.117 v1(57.912,110.109)
P2_C: R8.1 R21.2 U1.9 | length 35.5
  Top Layer w0.3: v1(66.548,94.107) 66.548,93.863 U1.9@68.008,92.404
  Mid-Layer 2 w0.3: v1(66.548,94.107) 66.548,94.361 80.645,108.458 80.645,109.22 v1(86.487,109.22)
  Bottom Layer w0.3: v1(86.487,109.22) 88.384,111.117 R8.1 ; R8.1 R21.2
RESET: R4.2 R6.2 U2.1 U2.2 | length 50.5
  Top Layer w0.3: v2(81.026,93.218) 84.201,93.218 v2(84.836,92.583) ; U2.1 89.281,61.214 v2(89.281,80.264)
  Mid-Layer 2 w1: U2.2 U2.1
  Bottom Layer w0.3: v2(81.026,93.218) 81.653,93.845 R4.2 ; v2(84.836,92.583) 85.09,92.583 89.281,88.392 v2(89.281,80.264) 89.154,80.264 87.884,78.994 86.75,78.994 R6.2
RESET_MCU: J1.6
SCK: IC4.6 J4.5 P1.5 U1.20 | length 96.3
  Top Layer w0.3: v1(67.31,81.534) 66.167,82.677 v1(66.167,84.074) 66.466,84.074 U1.20 ; v1(71.12,70.104) 71.12,66.929 73.533,64.516 IC4.6
  Mid-Layer 2 w0.3: v1(59.817,87.884) 59.817,82.296 v1(61.595,80.518) ; v1(60.198,92.837) 60.198,90.297 62.103,88.392 63.754,88.392 64.008,88.138 64.008,86.233 v1(66.167,84.074) ; v1(67.31,81.534) 67.31,81.407 62.23,76.327 62.23,74.676 64.643,72.263 64.897,72.263 67.056,70.104 v1(71.12,70.104) ; v1(69.596,101.6) 70.485,101.6 72.771,103.886 74.422,105.537 74.422,105.791 74.422,113.665 73.025,115.062 P1.5
  Bottom Layer w0.3: J4.5 60.763,81.858 61.595,81.026 v1(61.595,80.518) 62.611,80.518 63.95,81.857 ; v1(60.198,92.837) 68.961,101.6 v1(69.596,101.6) ; 63.5,81.407 v1(66.167,84.074)
SCL: IC1.2 R12.2 U1.32 U4.8 U10.2 | length 52.3
  Top Layer w0.3: v1(67.31,77.978) 68.072,78.74 71.138,78.74 IC1.2 ; U4.8 69.215,74.295 70.612,72.898 v1(71.755,72.898) ; v1(72.517,71.501) 72.771,71.247 74.676,71.247 75.494,72.065 U10.2 ; v1(73.533,74.676) 74.676,75.819 76.581,75.819 79.121,75.819 v1(82.55,79.248) 82.55,80.69 U1.32
  Mid-Layer 2 w0.3: v1(67.31,77.978) 67.31,76.2 72.009,71.501 v1(72.517,71.501) 72.517,73.025 73.152,73.66 73.533,74.041 v1(73.533,74.676)
  Bottom Layer w0.3: v1(71.755,72.898) 71.755,72.263 v1(72.517,71.501) ; R12.2 81.661,80.137 v1(82.55,79.248)
SDA: IC1.4 R13.1 U1.31 U4.9 U10.1 | length 43.9
  Top Layer w0.3: U4.9 69.399,73.095 v1(69.596,72.898) ; IC1.4 70.248,77.741 69.469,76.962 69.469,75.438 70.612,74.295 v1(71.374,74.295) ; v1(73.533,71.882) 73.969,71.882 U10.1 ; U1.31 80.391,82.142 v1(80.391,79.629) ; U10.1@74.844,72.758 74.844,73.447 75.438,74.041 78.232,74.041 v1(82.55,78.359)
  Bottom Layer w0.3: v1(69.596,72.898) 71.755,70.739 72.898,70.739 73.533,71.374 v1(73.533,71.882) 73.533,72.136 v1(71.374,74.295) ; R13.1 80.01,80.899 v1(82.55,78.359) ; v1(80.391,79.629) 80.416,79.654 81.255,79.654
SWCLK: J1.4 R26.2 U1.45 | length 48.5
  Top Layer w0.3: J1.4 66.675,55.88 68.453,57.658 72.517,57.658 v1(76.454,61.595) ; U1.45 73.025,93.462 73.025,92.71 v1(75.057,90.678)
  Mid-Layer 2 w0.3: v1(75.057,90.678) 75.057,62.992 v1(76.454,61.595)
  Bottom Layer w0.3: v1(76.454,61.595) R26.2
SWDIO: J1.2 R9.2 U1.46 | length 58.2
  Top Layer w0.3: v1(59.436,75.946) 60.579,75.946 64.008,79.375 v1(69.088,79.375) ; v2(61.214,56.134) 63.627,56.134 J1.2 ; U1.46 72.517,93.661 72.517,92.329 v1(73.914,90.932)
  Mid-Layer 2 w0.3: v2(55.626,73.025) 55.626,69.723 55.626,58.293 56.388,57.531 59.817,57.531 v2(61.214,56.134) ; v1(69.088,79.375) 73.914,84.201 v1(73.914,90.932)
  Bottom Layer w0.3: v2(55.626,73.025) 56.642,74.041 R9.2 ; R9.2@57.471,74.105 v1@59.369,76.01
TVC_X: J3.2 U1.26 | length 39.9
  Top Layer w0.3: U1.26 80.257,78.74 v1(81.153,78.74) ; J3.2 77.47,59.055 77.47,63.373 78.613,64.516 81.788,64.516 82.677,65.405 v2(82.677,66.421)
  Mid-Layer 2 w0.3: v1(81.153,78.74) 81.153,67.945 v2(82.677,66.421)
TVC_Y: J3.1 U1.25 | length 40.6
  Top Layer w0.3: U1.25 72.674,85.568 v1(80.264,77.978)
  Mid-Layer 2 w0.3: J3.1 72.771,54.864 72.771,56.642 74.676,58.547 76.962,58.547 80.391,61.976 80.391,75.692 80.264,75.819 v1(80.264,77.978)
TXLED: R5.2 U1.39 | length 44.8
  Top Layer w0.3: v1(56.261,70.612) 61.214,70.612 62.103,71.501 71.374,71.501 74.803,74.93 v1(75.819,74.93) ; U1.39 77.151,93.345 v1(77.978,93.345)
  Mid-Layer 2 w0.3: v1(75.819,74.93) 77.978,77.089 v1(77.978,93.345)
  Bottom Layer w0.3: v1(56.261,70.612) 56.769,70.104 R5.2
U1_1: C1.1 U1.1 X1.2 | length 19.3
  Top Layer w0.3: X1.2 66.929,101.473 67.818,102.362 70.358,102.362 v1(75.692,97.028) 72.631,97.028 U1.1
  Bottom Layer w0.3: v1(75.692,97.028) 76.835,98.171 C1.1
U1_2: C2.1 U1.2 X1.1 | length 31
  Top Layer w0.3: v1(66.929,97.282) X1.1 ; U1.2 71.12,94.242 71.12,90.376 v1(71.12,89.154)
  Mid-Layer 2 w0.3: v1(66.929,97.282) 63.627,97.282 v1(62.357,98.552) 62.357,92.837 62.865,92.329 66.04,89.154 v1(71.12,89.154)
  Bottom Layer w0.3: v1(62.357,98.552) 63.053,99.248 C2.1
U1_4: C7.1 U1.4 | length 9.1
  Top Layer w0.3: U1.4 69.088,94.859 69.088,96.012 70.485,97.409 72.009,97.409 72.771,98.171 v1(73.152,98.171)
  Bottom Layer w0.3: v1(73.152,98.171) 73.34,98.359 C7.1
U1_40: C5.2 R4.1 U1.40 | length 7.5
  Top Layer w0.3: U1.40@75.503,92.404 77.46,94.361 v1(78.359,94.361)
  Bottom Layer w0.3: v1(78.359,94.361) 78.867,94.869 R4.1 ; R4.1 80.146,96.594 C5.2
U1_43: C4.1 U1.43 | length 6.8
  Top Layer w0.3: U1.43 77.878,96.901 v1(78.105,96.901)
  Bottom Layer w0.3: v1(78.105,96.901) 78.613,97.409 C4.1
U13_4: R25.2 U13.4 | length 3.4
  Top Layer w0.3: U13.4 83.058,86.027 v2(83.058,85.979)
  Bottom Layer w0.3: v2(83.058,85.979) R25.2
VIN: BATT.2 C14.2 C24.2 C25.1 D2.3 IC2.17 IC3.2 IC3.3 Q1.1 R10.2 R22.2 R23.2 R27.2 R28.1 R36.2 U13.5 | length 191
  Top Layer w1: C25.1 55.753,60.706 55.753,65.405 56.388,66.04 IC3.3 IC3.2 ; v3(71.374,106.68) 71.374,110.617 IC2.17 ; v3(77.216,66.675) 77.216,68.58 77.724,69.088 v3(82.804,69.088) ; D2.3 87.818,85.979 v3(87.884,85.979) 87.836,86.027 U13.5
  Mid-Layer 2 w1: C25.1 58.674,61.341 71.755,61.341 73.279,59.817 75.946,59.817 76.708,59.817 78.105,61.214 78.359,61.468 78.359,62.611 77.216,63.754 v3(77.216,66.675) ; BATT.2 62.484,100.838 64.135,99.187 65.659,99.187 66.802,100.33 66.802,102.108 v3(71.374,106.68) ; v3(82.804,69.088) 82.804,74.803 87.884,79.883 v3(87.884,85.979) 87.503,86.36 87.503,112.522 83.566,116.459 v3(83.566,117.221)
  Bottom Layer w1: C25.1 60.415,63.082 C14.2 ; BATT.2 62.992,103.886 R10.2 ; R23.2 62.992,109.973 62.992,110.667 63.495,110.164 R10.2@63.495,103.886 ; v3(71.374,106.68) 71.374,110.998 74.803,114.427 83.193,114.427 R22.2 83.574,117.213 v3(83.566,117.221) ; R27.2 80.568,108.331 81.534,108.331 82.296,109.093 82.296,112.649 83.575,113.928 R22.2 ; Q1.1 85.529,78.105 R36.2 84.328,79.638 84.328,81.915 84.963,82.55 86.868,82.55 87.949,83.631 C24.2 87.949,85.914 v3(87.884,85.979)
VOUT: R10.1 R11.1 U1.7 | length 13.7
  Top Layer w0.3: v1(68.072,101.6) 68.072,93.754 U1.7
  Bottom Layer w0.3: R10.1 R11.1 67.437,102.235 v1(68.072,101.6)
pads on no net: IC1.6 IC4.3 IC4.7 J4.1 J4.8 P1.8 U1.3 U1.22 U1.37 U1.41 U1.47 U3.4 U4.1 U4.5 U4.12 U4.13 U10.3 U12.4 U12.6 U12.7 U12.8 U12.9

## Polygon pours and split planes (outlines as drawn)
GND on Mid-Layer 1 (solid): 39.497,126.111 39.497,39.497 38.1,38.1 151.892,38.1 153.162,39.37 153.162,117.602 120.396,150.368 120.396,148.209 122.301,146.304

## Keep-outs
Keep-Out Layer:
  lines w0.254: 54.498,54.603 ccw(c58.098,54.603) 58.098,51.003 ; 54.498,117.403 cw(c58.098,117.403) 58.098,121.003 ; 86.898,51.003 ccw(c86.898,54.603) 90.498,54.603 ; 86.898,121.003 cw(c86.898,117.403) 90.498,117.403

## Silkscreen, mask and mechanical layers (free items; w line width, h text height)
Top Overlay:
  text "PY 1" at 58.166,114.554 h2
  text "PY 2" at 82.042,114.427 h2
  text "+" at 54.61,111.252 h1.5 r225
  text "+" at 88.519,110.998 h1.5 r225
  text "-" at 54.737,105.918 h1.5 r90
  text "-" at 88.646,105.537 h1.5 r90
  text "+" at 88.519,100.203 h1.5 r225
  text "+" at 54.737,100.076 h1.5 r135
  text "-" at 88.646,95.25 h1.5 r90
  text "-" at 54.864,94.742 h1.5 r90
  text "ROLL" at 81.915,91.694 h2
  text "BATT" at 57.404,91.44 h2
  text "Euler Edition" at 60.452,86.106 h1
  text "Made in U.S.A" at 60.452,85.217 h1
  text "V.2" at 82.677,80.264 h4
  text "Sensors" at 66.294,79.375 h2.5
  text "ON" at 55.626,77.597 h1.5 r359
  text "RX" at 55.88,73.787 h1.5
  text "TX" at 55.88,71.628 h1.5
  text "RESET" at 83.693,60.071 h1
  text "DIO" at 63.119,57.658 h1
  text "CLK" at 65.532,57.658 h1
  text "RST" at 68.326,57.658 h1
  text "-" at 79.248,57.531 h1 r90
  text "X" at 73.914,57.404 h1 r90
  text "+" at 76.581,57.404 h1 r225
  text "TVC" at 81.026,55.499 h1 r270
  text "DEBUG" at 62.357,52.959 h1 r90
  text "+" at 63.273,51.535 h1 r225
  text "+" at 76.581,51.308 h1 r225
  text "-" at 79.248,51.308 h1 r90
  text "-" at 66.794,51.181 h1 r90
  text "-" at 69.334,51.181 h1 r90
  text "Y" at 73.914,51.181 h1 r180
Bottom Overlay:
  text "5555" at 83.947,118.999 h1
  text "SAMD21" at 78.359,89.154 h2